# Altium PCB Inverter-PCB.PcbDoc
Units mil, origin at the board's own origin, x right, y up, seen from the top; angles counter-clockwise.
Board outline 6000 x 4000 mil, 2 copper layers (Top Layer, Bottom Layer); 16 components, 16 nets, 48 pads, 0 vias.
Unrouted connection lines stored in the file: 31.
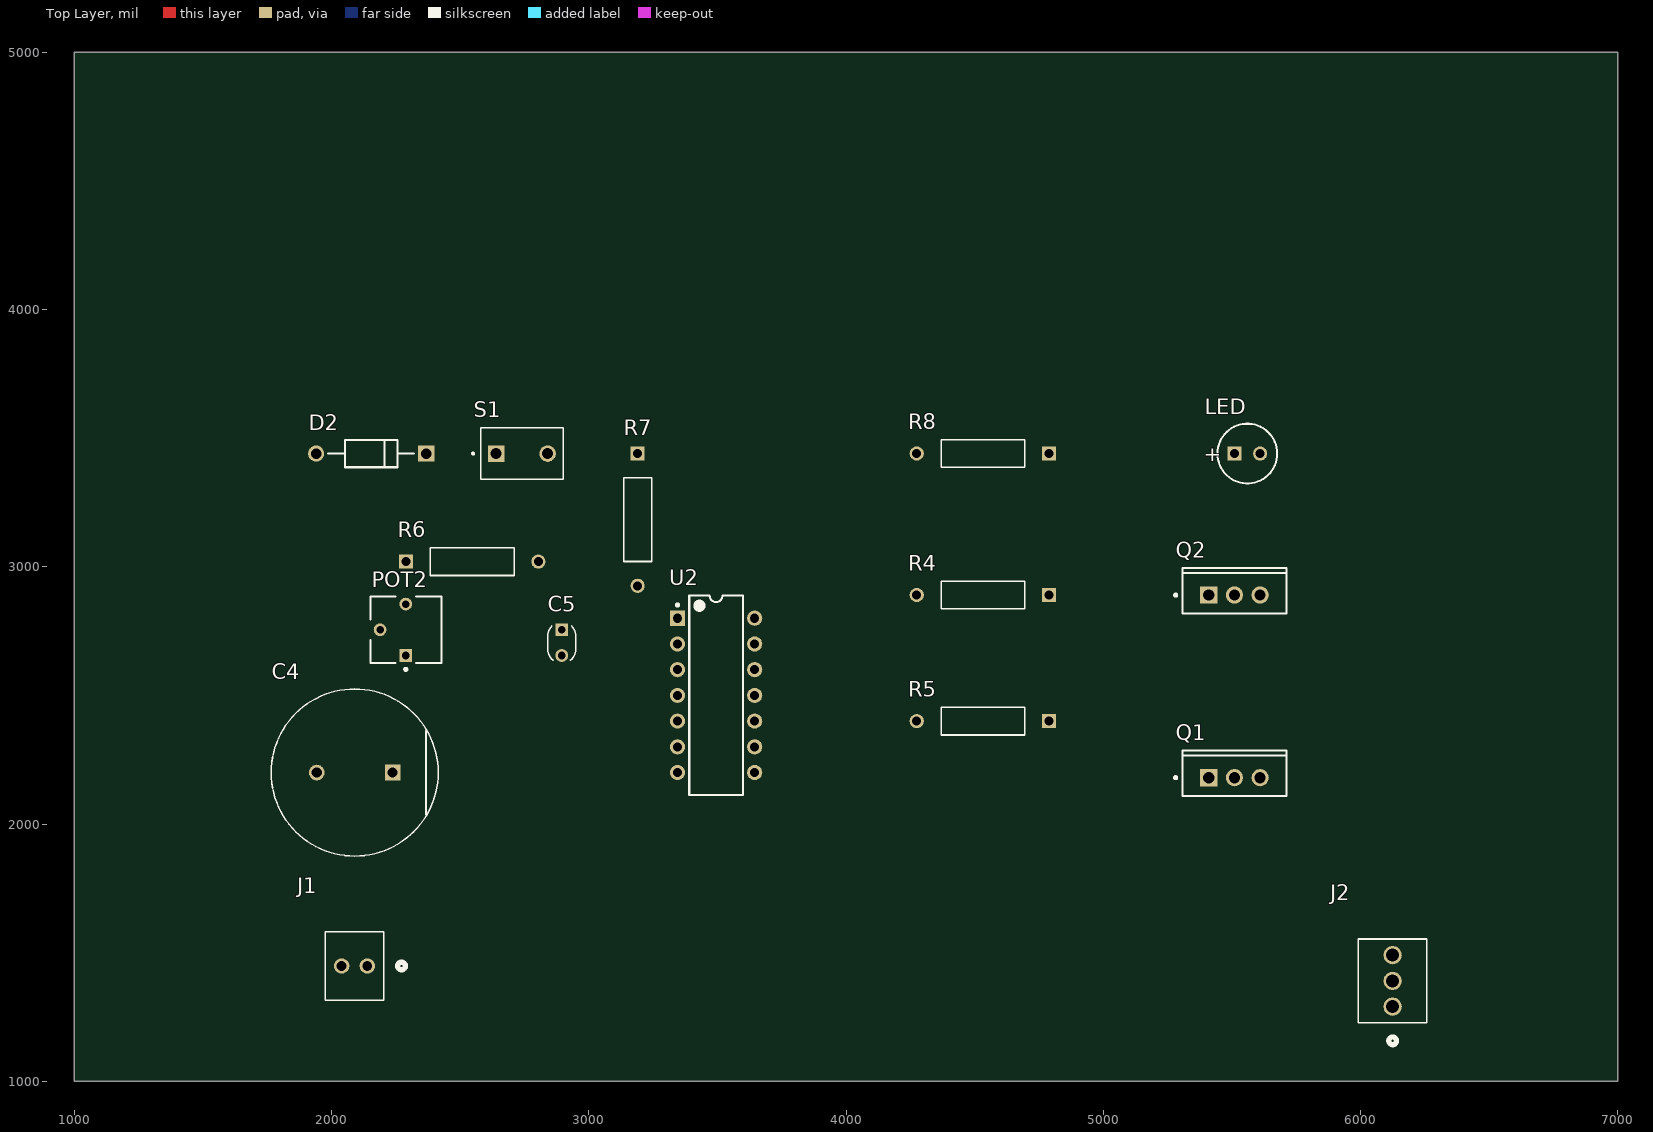
[diagram p0: Top Layer view]
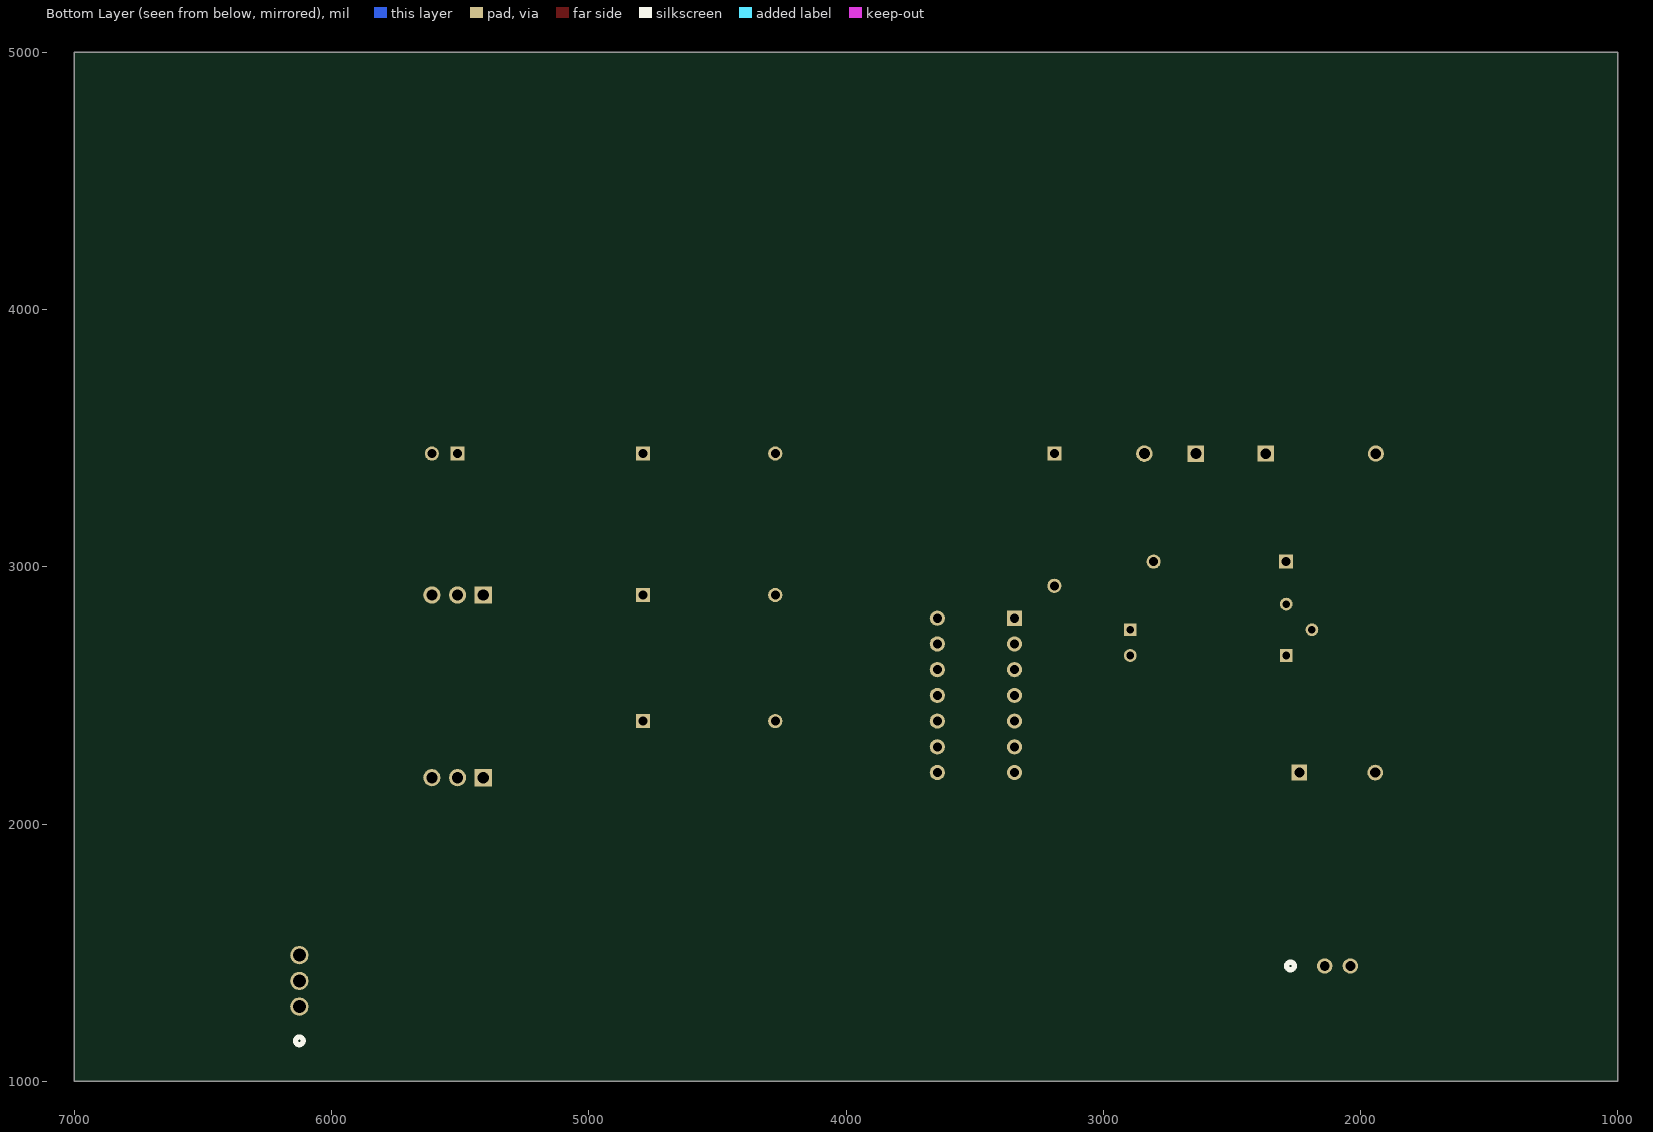
[diagram p1: Bottom Layer view, seen from below]

## Layer stack, top to bottom
Top Solder: solder mask 0.4, Solder Resist, Dk 3.5
Top Layer: signal copper 1.4
Dielectric 1: dielectric 12.6, FR-4, Dk 4.8
Bottom Layer: signal copper 1.4
Bottom Solder: solder mask 0.4, Solder Resist, Dk 3.5

## Board outline
1000,1000 7000,1000 7000,5000 1000,5000

## Design rules (kind name [scope] priority, off if disabled: settings)
Clearance [All] p1: gap=10 ignorepadtopadclearanceinfootprint=FALSE except(0: Arc-Hole Track-Hole SMDPad-Hole THPad-Hole Via-Hole Fill-Hole Poly-Hole Region-Hole Text-Hole)
PolygonConnect [All] p1: connectstyle=Relief reliefconductorwidth=10 reliefentries=4 polygonreliefangle="90 Angle" airgapwidth=10
RoutingVias [All] p1: holewidth=28 width=50 viastyle="Through Hole" minholewidth=28 minwidth=50 maxholewidth=28 maxwidth=50
SolderMaskExpansion [All] p1: expansion=4 istentingtop=FALSE
Width [All] p1: maxlimit=10 minlimit=10 preferedwidth=10
30 further rules are at their usual default settings.

## Classes and differential pairs
component class INVERTER_ALTIUM: C4 C5 D2 LED POT2 Q1 Q2 R4 R5 R6 R7 R8 S1 U2

## Components (designator, comment, footprint, x,y, rotation, side; value= is the part's Value field where it differs from the comment)
C4 "2200uF / 25V" FP-RAD-TH-D_16_0_5-L_25_2-MFG 2090,2200 r180 top
C5 "0.01uF" CAP_C315_KEM 2895,2755 r270 top
D2 "1N4007-E3/54" FP-1N4007-MFG 2154.09,3440 r180 top value=15pF
J1 "2P Terminal" CONN2_910002_WRE 2139.17,1448.08 r180 top
J2 "2P Terminal" CONN3_910003_WRE 6125,1290 r90 top
LED "LED" KING-WP7113SYD_V 5560,3440 r0 top
POT2 "100 kOhm" BOUR-3362P 2290,2755 r90 top
Q1 "IRF540" NXP-SOT78A 5510,2180 r90 top
Q2 "IRF540" NXP-SOT78A 5510,2890 r90 top
R4 "220 Ohm" RES_PRO1 4275,2890 r180 top
R5 "220 Ohm" RES_PRO1 4275,2400 r180 top
R6 "390 kOhm" RES_PRO1 2804,3020 r0 top
R7 "330 Ohm" RES_PRO1 3190,2926 r270 top
R8 "820 Ohm" RES_PRO1 4275,3440 r180 top
S1 "Switch" SW_PMS9P1B10M2QE 2739.93,3440 r0 top
U2 "CD4047BE" N0014A 3495,2500 r0 top

## Footprints (in the part's own frame and the unit in brackets; to place one, negate y for a bottom-side part, rotate by r counter-clockwise, add the part's x,y. Pads: shape width x height; smd on the part's side, far side on the other; paste and mask are expansions set on the pad)
BOUR-3362P [mm] "THD, 3-Leads, Body 6.6x6.99mm, Pitch 2.54mm"
  rect 1.25x1.25 hole 0.75: 1(-2.54,0.035)
  round 1.25 hole 0.75: 2(0,2.575) 3(2.54,0.035)
  silkscreen extent -4.02,-3.49 3.3,3.49, body extent -3.3,-3.49 3.3,3.49, height 4.95
CAP_C315_KEM [mil]
  rect 50x50 hole 30: 1(0,0)
  round 50 hole 30: 2(100,0)
  silkscreen extent -15,-55 119,55, body extent -25,-50 125,50, height 210
CONN2_910002_WRE [mil]
  round 60 hole 38 mask+0: 1(0,0) 2(100,0)
  silkscreen extent -148,-133 163,133, body extent 0,0 10,10, height 10
CONN3_910003_WRE [mil]
  round 71 hole 51 mask+0: 1(0,0) 2(100,0) 3(200,0)
  silkscreen extent -148,-133 263,133, body extent 0,0 10,10, height 10
FP-1N4007-MFG [mm]
  rect 1.6x1.6 hole 1.05 paste-1000 mask+0: 1(-5.438,0)
  round 1.6 hole 1.05 paste-1000 mask+0: 2(5.438,0)
  silkscreen extent -4.24,-1.35 4.24,1.35, body extent -6.34,-1.45 6.34,1.45, height 0.25
FP-RAD-TH-D_16_0_5-L_25_2-MFG [mm]
  rect 1.55x1.55 hole 1 paste-1000 mask+0: 1(-3.75,0)
  round 1.55 hole 1 paste-1000 mask+0: 2(3.75,0)
  silkscreen extent -8.25,-8.25 8.25,8.25, body extent -8.35,-8.35 8.35,8.35, height 0.25
KING-WP7113SYD_V [mm] "THD, 2-Leads, Dia 5.9mm, Body Length 8.6mm"
  rect 1.4x1.4 hole 0.889: 1(-1.27,0)
  round 1.4 hole 0.889: 2(1.27,0)
  silkscreen extent -2.95,-2.95 2.95,2.95, body extent -2.95,-2.95 2.5,2.95, height 15.5
N0014A [mm] "DIP, 14-Leads, Body 19.7x6.6mm, Pitch 2.54mm"
  rect 1.5x1.5 hole 0.9: 1(-3.81,7.62)
  round 1.5 hole 0.9: 2(-3.81,5.08) 3(-3.81,2.54) 4(-3.81,0) 5(-3.81,-2.54) 6(-3.81,-5.08) 7(-3.81,-7.62) 8(3.81,-7.62) 9(3.81,-5.08) 10(3.81,-2.54) 11(3.81,0) 12(3.81,2.54) 13(3.81,5.08) 14(3.81,7.62)
  silkscreen extent -3.93,-9.85 2.65,9.85, body extent -3.95,-9.85 3.95,9.85, height 5.08
NXP-SOT78A [mm] "FM, 3-Leads, Body 10.3x4.5mm, Pitch 2.54mm"
  rect 1.7x1.7 hole 1.1: 1(0,2.54)
  round 1.7 hole 1.1: 2(0,0) 3(0,-2.54)
  silkscreen extent -1.82,-5.15 2.68,5.92, body extent -1.82,-5.15 2.68,5.15, height 19.1
RES_PRO1 [mil]
  rect 55x55 hole 35: 1(-514,0)
  round 55 hole 35: 2(0,0)
  silkscreen extent -420,-54 -94,54, body extent -526,-49 12,48, height 98
SW_PMS9P1B10M2QE [mm]
  rect 1.635x1.635 hole 1.09: 1(-2.54,0)
  round 1.635 hole 1.09: 3(2.54,0)
  silkscreen extent -4.91,-2.54 4.06,2.54

## Part data
C4: library part CMP-05427-000889-1, "Aluminum Electrolytic Capacitors (Radial Lead Type) AEC-Q200 Qualified 2200uF ±20% 25V", Capacitance=2.2mF, Case/Package=Radial, ESR (Equivalent Series Resistance)=22mR, Leakage Current=550uA, Max Operating Temperature=135°C, Min Operating Temperature=-40°C, Package Quantity=100, Ripple Current=2.3A, Ripple Current (AC)=2.76A, Tolerance=20%, Voltage=25V, Construction=RADIAL, Diameter=16mm, Height=25mm, Height - Seated (Max)=1.063inch, Lead Diameter=0.8mm, Lead Pitch=7.5mm, Lead/Base Style=Straight, Length=25mm, Life (Hours)=2000Hour, Mount="Through Hole", Number of Pins=2, Outside Diameter=16mm, Packaging=Bulk, Radiation Hardening=No, REACH SVHC="No SVHC", RoHS Compliant=Yes, Series=TP, Termination=Radial, Voltage Rating=25V, Voltage Rating (DC)=25V
C5: library part C315C103M1U5TA, "No Description Available", Mfr_Name=Kemet, Copyright="Copyright (C) 2022 Ultra Librarian. All rights reserved.", Digi-Key_Part_Number_1=399-4149-ND, Manufacturer_Part_Number=C315C103M1U5TA, RefDes=RefDes, Type=DEV
D2: library part CMP-02540-000046-1, "DIODE GEN PURP 1KV 1A DO204AL", Capacitance=15pF, Forward Current=1A, Manufacturer=Vishay, Max Junction Temp=+150°C, Max Repetitive Reverse Voltage=1000V, Max Surge Forward Current=30A, Package=1N4007, Peak Reverse Current=30uA, Temperature="-50°C to +150°C", Temperature Range Low=-50°C, Automotive=No, Category=Diode, ComponentLink2Description=Datasheet, ComponentLink2URL=http://www.vishay.com/docs/88503/1n4001.pdf, Device Class L1="Discrete Semiconductors", Device Class L2=Diodes, Device Class L3="Rectifier Diodes", Digikey Description="DIODE GEN PURP 1KV 1A DO204AL", Height=2.7mm, Ipc Land Pattern Name=DIOPA1088W105L520D270, Lead Free=Yes, Manufacturer Part Number=1N4007-E3/54, Mouser Description="Rectifiers Vr/1000V Io/1A", Octopart=https://octopart.com/1n4007-e3%2F54-vishay-39548207, RoHS=TRUE, Temperature Range High=+150°C
J1: library part 691210910002, "No Description Available", Mfr_Name="Wurth Electronics", Copyright="Copyright (C) 2022 Ultra Librarian. All rights reserved.", Digi-Key_Part_Number_1=732-691210910002-ND, Manufacturer_Part_Number=691210910002, RefDes=RefDes, Type=DEV
J2: library part 691210910003, "No Description Available", Mfr_Name="Wurth Electronics", Copyright="Copyright (C) 2022 Ultra Librarian. All rights reserved.", Digi-Key_Part_Number_1=732-691210910003-ND, Manufacturer_Part_Number=691210910003, RefDes=RefDes, Type=DEV
LED: library part CMP-1757-00003-1, "The Super Bright Yellow Device, 2 V, -40 to 85 degC, 2-Pin THD, RoHS, Tape and Reel", Case\Package=Axial, Max Operating Temperature="155 degC", Min Operating Temperature="-55 degC", Package Quantity=200, Power Rating="250 mW", Resistance="22.1 kohm", Tolerance=1%, Voltage Rating="250 V", ComponentLink1Description=Datasheet, ComponentLink1URL=http://www.kingbrightusa.com/images/catalog/SPEC/WP7113SYD.pdf, DatasheetVersion="Rev. 7B, 01/2015", Length="0.248 inch", Mount="Through Hole", PackageDescription="2-Pin Through Hole Device, Dia 5.9 mm, Body Length 8.6 mm", PackageReference=WP7113SYD, Packaging=Bulk, RoHSCompliant=true
POT2: library part CMP-1747-00004-1, "Square Trimpot(R) Trimming Potentiometer, 10 KOhm, 300 V, -55 to 125 degC, 3-Pin THD, RoHS, Tube", Case Code (Imperial)=0612, Case Code (Metric)=1632, Case/Package=1206, Max Operating Temperature=125degC, Min Operating Temperature=-25degC, Package Quantity=5000, Power Rating="1 W", Resistance="50 mohm", Tolerance=1%, Voltage Rating="220 mV", ComponentLink1Description="Manufacturer URL", ComponentLink1URL=http://www.bourns.com/, ComponentLink2Description=Datasheet, ComponentLink2URL=http://www.bourns.com/docs/Product-Datasheets/3362.pdf, DatasheetVersion=May-16, Height="0.6 mm", Length="3.2 mm", Mount="Surface Mount", PackageDescription="3-Pin Through Hole Device, Body 6.6 x 6.99 mm, Pitch 2.54 mm", PackageReference=3326P, Packaging="Tape and Reel", Pins=2, REACH SVHC="No SVHC", RoHSCompliant=True, Width="1.6 mm"
Q1 Q2: library part CMP-1259-00528-1, "N-Channel TrenchMOS Logic Level FET, 100 V, 46 A, 3-Pin SOT78A, Rail", Manufacturer="NXP Semiconductors", PartNumber=BUK9529-100B,127, Automotive Qualified=Y, Channel Type=N, Code_JEDEC="3-lead TO-220AB", Code_JEITA=SC-46, ComponentLink1Description="Manufacturer URL", ComponentLink1URL=http://www.nxp.com/, ComponentLink2Description=Datasheet, ComponentLink2URL=http://www.nxp.com/documents/data_sheet/BUK9529-100B.pdf, ComponentLink3Description="Package Specification", ComponentLink3URL=http://www.nxp.com/documents/outline_drawing/sot078a_po.pdf, DatasheetVersion="Rev. 02", ID [max] (A)=46, IDM [max] (A)=186, Mounting Technology="Through Hole", PackageDescription="3-Pin Flange Mount, Vertical Straight Lead, Body 10 x 4.3 mm, Pitch 2.54 mm", PackageReference=SOT78A, PackageVersion="05-03-14, 03/2005", Packing=Rail, Qr [typ] (nC)=196, VDS [max] (V)=100, VGSth [typ] (V)=1.5
R4 R5 R6 R7 R8: library part PR01000101001JA100, "No Description Available", Mfr_Name=Vishay, Copyright="Copyright (C) 2022 Ultra Librarian. All rights reserved.", Digi-Key_Part_Number_1=BC4684CT-ND, Digi-Key_Part_Number_2=BC4684TB-ND, Manufacturer_Part_Number=PR01000101001JA100, RefDes=RefDes, Type=DEV
S1: library part PMS9P1B10M2QE, "Pushbutton Switch SPST-NO Standard Through Hole", Package=None, Availability="In Stock", Check_prices=https://www.snapeda.com/parts/PMS9P1B10M2QE/TE%20Connectivity/view-part/4303237/?ref=eda, MF="TE Connectivity ALCOSWITCH Switches", MP=PMS9P1B10M2QE, Price=None, Purchase-URL=https://pricing.snapeda.com/search/part/PMS9P1B10M2QE/?ref=eda, SnapEDA_Link=https://www.snapeda.com/parts/PMS9P1B10M2QE/TE%20Connectivity/view-part/4303237/?ref=snap
U2: library part CMP-1629-00101-2, "CMOS Low-Power Monostable/Astable Multivibrator, N0014A, TUBE", F @ Nom Voltage(Max)(Mhz)=8, Generic Part Number=CD4047B, ICC @ Nom Voltage(Max)(mA)=0.06, Manufacturer="Texas Instruments", Operating Temperature Range(C)="-55 to 125", Rating=Military, tpd @ Nom Voltage(Max)(ns)=450, Voltage(Nom)(V)=10, Bits(#)=1, Code_JEDEC=MS-001, DatasheetVersion=SCHS044C, Input Type=CMOS, Output Drive (IOL/IOH)(Max)(mA)=4/-4, Output Type=CMOS, PackageReference=N0014A, Technology Family=CD4000, VCC(Max)(V)=18, VCC(Min)(V)=3

## Nets (pads, with @x,y where several pads share a name; then routed paths per layer and width w, separated by ;. In a path a pad name is that pad's centre, name@x,y a point inside that pad or via, vN(x,y) a via of type N, cw(c..) or ccw(c..) an arc to the next point about the centre after c; other vN are vias at no path point)
GND: C4.1 J1.1 LED.2 Q1.3 Q2.3 U2.7 U2.8 U2.9 U2.12
NetC4_2: C4.2 D2.2 J1.2 J2.2
NetC5_1: C5.1 U2.1
NetC5_2: C5.2 POT2.1 U2.3
NetD2_1: D2.1 S1.1
NetJ2_1: J2.1 Q1.2
NetJ2_3: J2.3 Q2.2
NetLED_1: LED.1 R8.1
NetPOT2_2: POT2.2 POT2.3 R6.1
NetQ1_1: Q1.1 R5.1
NetQ2_1: Q2.1 R4.1
NetR4_2: R4.2 U2.11
NetR5_2: R5.2 U2.10
NetR6_2: R6.2 U2.2
NetR7_1: R7.1 R8.2 S1.3
NetR7_2: R7.2 U2.4 U2.5 U2.6 U2.14
pads on no net: U2.13

## Text inside footprints (layer, text, board x,y; h text height)
LED: Top Overlay "+" at 5390,3410 h59.06